# Altium PCB PCB_螺丝刀_TEST（测试用！！！）.pcbdoc
Units mm, origin at the board's own origin, x right, y up, seen from the top; angles counter-clockwise.
Board outline 48.26 x 97.66 mm, 2 copper layers (Top Layer, Bottom Layer); 30 components, 23 nets, 91 pads, 9 vias.
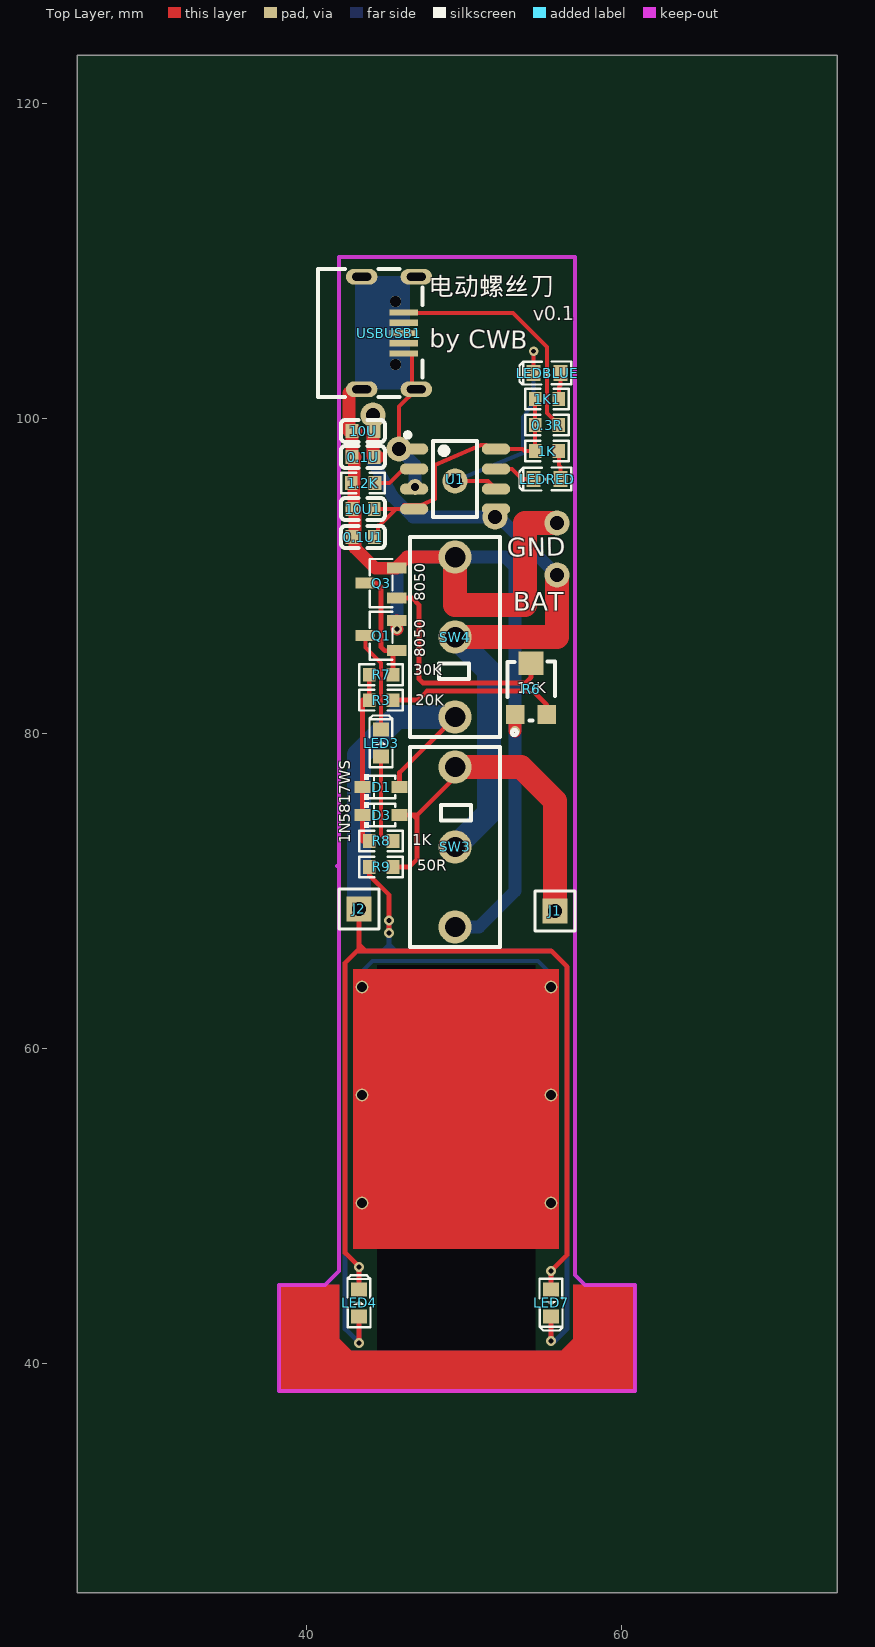
[diagram p0: Top Layer view]
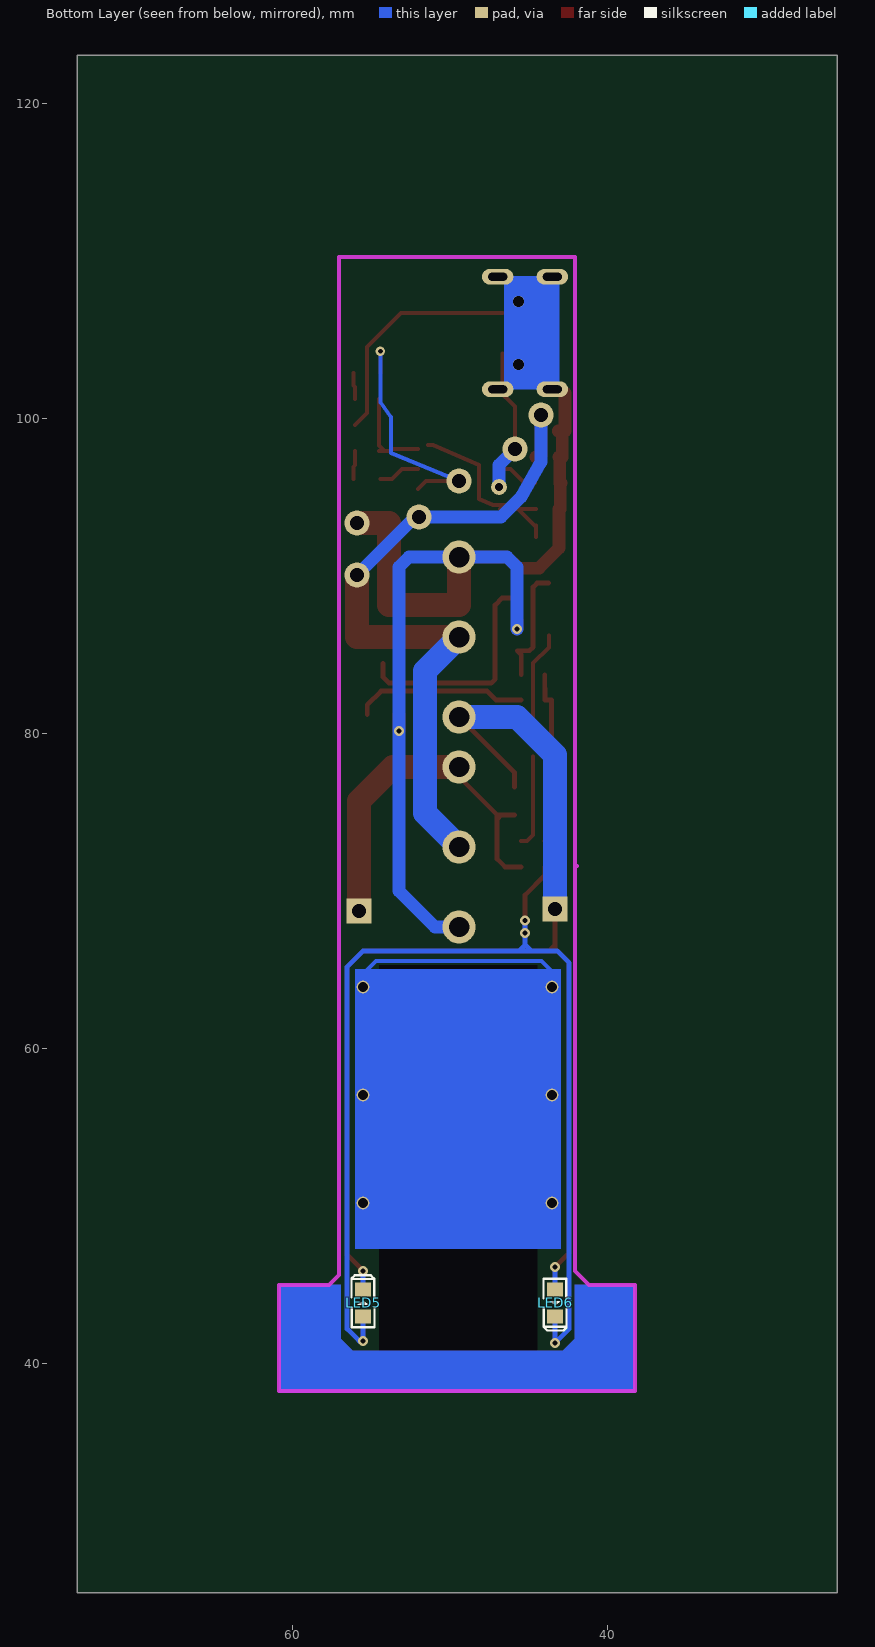
[diagram p1: Bottom Layer view, seen from below]

## Layer stack, top to bottom
Top Layer: signal copper (thickness not stored)
Dielectric: dielectric 0.32, FR-4, Dk 4.8
Bottom Layer: signal copper (thickness not stored)

## Board outline
73.66,25.4 25.4,25.4 25.4,123.063 73.66,123.063
cut-out: 54.483,40.259 54.483,65.259 44.45,65.259 44.45,40.259

## Components (designator, comment, footprint, x,y, rotation, side; value= is the part's Value field where it differs from the comment)
0.1U "10u" C0603 43.561,97.536 r0 top
0.1U1 "10u" C0603 43.561,92.456 r0 top
0.3R "0.3R" R0603 55.245,99.568 r180 top
1.2K "1.2k/1%" R0603 43.561,95.885 r0 top
1K "1k" R0603 55.245,97.917 r0 top
1K1 "1k" R0603 55.245,101.219 r0 top
10U "0.1u" C0603 43.561,99.187 r0 top
10U1 "0.1u" C0603 43.561,94.234 r0 top
D1 "1N5817WS" SOD-323_L1.8-W1.3-LS2.5-RD 44.704,76.581 r0 top
D3 "1N5817WS" SOD-323_L1.8-W1.3-LS2.5-RD 44.704,74.803 r0 top
J1 "电机+" HDR-M-2.54_1X1 55.753,68.707 r0 top
J2 "电机-" HDR-M-2.54_1X1 43.307,68.834 r0 top
LED3 "LED-0603_R" LED0603_RED#1 44.704,79.375 r90 top
LED4 "LED-0603_R" LED0603_RED#1 43.307,43.815 r90 top
LED5 "LED-0603_R" LED0603_RED#2 55.499,43.815 r270 bottom
LED6 "LED-0603_R" LED0603_RED#2 43.307,43.815 r90 bottom
LED7 "LED-0603_R" LED0603_RED#1 55.499,43.815 r270 top
LEDBLUE "LED-0603_G" LED0603_GREEN 55.245,102.87 r180 top
LEDRED "LED-0603_R" LED0603_RED#1 55.245,96.139 r180 top
Q1 "S8050_C2926165" SOT-23-3_L2.9-W1.3-P1.90-LS2.4-BR 44.704,86.191 r0 top
Q3 "S8050_C2926165" SOT-23-3_L2.9-W1.3-P1.90-LS2.4-BR 44.704,89.535 r0 top
R3 "20k" R0603 44.704,82.1 r180 top
R6 "10kΩ" RES-ADJ-SMD_3P-L3.0-W3.8-P1.75-BR 54.229,82.804 r270 top
R7 "30k" R0603 44.704,83.713 r180 top
R8 "1k" R0603 44.704,73.152 r180 top
R9 "50R" R0603 44.704,71.501 r180 top
SW3 "LF-108" SW-TH_DEALON_LF-108 49.403,72.771 r270 top
SW4 "LF-108" SW-TH_DEALON_LF-108 49.403,86.106 r90 top
U1 "TP4056_JX" SOP8_150MIL_JX 49.403,96.139 r270 top
USBUSB1 "micro 5PFour-legged board7.2There is a column card point0.4m" MICRO-USB-SMD_5P-P0.65-H-F-C40943 45.212,105.41 r270 top

## Footprints (in the part's own frame and the unit in brackets; to place one, negate y for a bottom-side part, rotate by r counter-clockwise, add the part's x,y. Pads: shape width x height; smd on the part's side, far side on the other; paste and mask are expansions set on the pad)
C0603 [mm]
  rect 0.8x0.9 smd: 1(-0.7,0) 2(0.7,0)
  silkscreen extent -1.41,-0.71 1.39,0.72
HDR-M-2.54_1X1 [mil]
  rect 62x62 hole 35: 1(0,0)
  silkscreen extent -50,-50 50,50
LED0603_GREEN [mm]
  rect 0.9x1 smd: 1(-0.85,0) 2(0.85,0)
  silkscreen extent -1.54,-0.73 1.75,0.73
LED0603_RED#1 [mm]
  rect 0.9x1 smd: 1(-0.85,0) 2(0.85,0)
  silkscreen extent -1.54,-0.73 1.75,0.73
LED0603_RED#2 [mm]
  rect 0.9x1 smd: 1(0.85,0) 2(-0.85,0)
  silkscreen extent -1.75,-0.73 1.54,0.73
MICRO-USB-SMD_5P-P0.65-H-F-C40943 [mm]
  oval 1x2 hole 0.5 slot 1.2 at 90 deg: 0(-3.575,-1.735) 0(-3.575,1.734) 0(3.575,-1.735) 0(3.575,1.734)
  rect 0.4x1.8 smd: 1(-1.301,0.934) 2(-0.65,0.934) 3(0,0.934) 4(0.65,0.934) 5(1.3,0.934)
  round 0.7 hole 0.7 unplated: ""(-2,0.414) ""(2,0.414)
  silkscreen extent -4.05,-4.51 4.05,2.14
R0603 [mm]
  rect 0.806x0.864 smd: 1(-0.753,0) 2(0.753,0)
  silkscreen extent -1.39,-0.66 1.39,0.66
RES-ADJ-SMD_3P-L3.0-W3.8-P1.75-BR [mm]
  rect 1.2x1.2 smd: 1(1.625,-1) 3(1.625,1)
  rect 1.5x1.6 smd: 2(-1.625,0)
  silkscreen extent -1.75,-1.51 2.92,1.51
SOD-323_L1.8-W1.3-LS2.5-RD [mm]
  rect 1x0.75 smd: 1(-1.173,0) 2(1.173,0)
  silkscreen extent -1.08,-0.8 0.9,0.8
SOP8_150MIL_JX [mm]
  oval 0.7x1.8 smd: 1(-1.905,-2.601) 2(-0.635,-2.601) 3(0.635,-2.601) 4(1.905,-2.601) 5(1.905,2.601) 6(0.635,2.601) 7(-0.635,2.601) 8(-1.905,2.601)
  silkscreen extent -2.95,-3.15 2.4,1.4
SOT-23-3_L2.9-W1.3-P1.90-LS2.4-BR [mm]
  rect 1.25x0.7 smd: 1(1,-0.95) 2(1,0.95) 3(-1,0)
  silkscreen extent -0.73,-1.53 0.73,1.53
SW-TH_DEALON_LF-108 [mm]
  round 2.1 hole 1.3: C(-5.08,0) NC(5.08,0) NO(0,0)
  silkscreen extent -6.35,-2.85 6.35,2.85

## Free pads (board coordinates)
  round 0.806 hole 0.61: 1(43.497,63.881) 1(55.499,63.881) 2(43.497,57.023) 2(55.499,57.023) 3(43.497,50.165) 3(55.499,50.165)
  round 1.6 hole 0.889: 6(55.88,90.043) 7(55.88,93.345) 8(49.403,96.012) 9(45.847,98.044) 10(51.943,93.726) 11(44.196,100.203)
  round 1 hole 0.5: 12(46.863,95.631)

## Via types
v1: diameter 0.62, hole 0.305, Top Layer to Bottom Layer, tented both sides, 8 vias
v2: diameter 0.61, hole 0.305, Top Layer to Bottom Layer, tented both sides, 1 vias

## Nets (pads, with @x,y where several pads share a name; then routed paths per layer and width w, separated by ;. In a path a pad name is that pad's centre, name@x,y a point inside that pad or via, vN(x,y) a via of type N, cw(c..) or ccw(c..) an arc to the next point about the centre after c; other vN are vias at no path point)
0: 
012: pad.1 pad.2 pad.3 | length 41.9
  Top Layer w0.254: pad.3@43.497,50.165 43.497,57.023 pad.1@43.497,63.881 ; pad.3@55.499,50.165 55.499,57.023 pad.1@55.499,63.881
  Bottom Layer w0.254: pad.1@43.497,63.881 43.497,64.868 44.169,65.54 54.67,65.54 55.499,64.711 pad.1@55.499,63.881
+5V: 0.3R.1 USBUSB1.1 | length 14.8
  Top Layer w0.254: USBUSB1.1@46.655,106.68 53.086,106.68 55.245,104.521 55.245,100.322 0.3R.1
BAT: 0.1U.2 10U.2 pad.6 pad.10 pad.11 SW3.NO SW4.NO U1.5 | length 46.5
  Top Layer w0.8: pad.11 44.196,97.601 0.1U.2 0.1U.2@44.515,97.536
  Top Layer w1.5: SW4.NO 55.88,86.106 pad.6
  Bottom Layer w0.8: pad.11 44.196,97.221 45.466,94.996 46.736,93.726 pad.10 52.197,93.726 pad.6
  Bottom Layer w1.5: SW3.NO 51.562,74.93 51.562,83.947 SW4.NO
BAT1: D1.1 D3.1 R3.2 R7.2 R8.2 | length 11.4
  Top Layer w0.3: D3.1 43.531,73.152 R8.2 ; D1.1 43.531,82.1 R3.2 ; D3.1 D1.1 ; R3.2 R7.2
GND: 0.1U1.1 0.1U.1 1.2K.1 10U1.1 10U.1 pad.7 pad.9 pad.12 Q1.2 Q3.2 R6.1 SW3.NC SW4.NC U1.1 U1.3 USBUSB1.0 USBUSB1.5 | length 81.6
  Top Layer w0.254: pad.9 45.847,100.735 USBUSB1.0@46.947,101.835 ; USBUSB1.5@46.655,104.11 46.655,101.836 USBUSB1.0@47.455,101.836
  Top Layer w0.8: USBUSB1.0@42.672,101.6 42.672,99.187 10U.1@43.114,99.187 ; 10U.1 0.1U.1 ; 1.2K.1@42.926,95.885 42.979,95.832 10U1.1@42.979,94.234 ; 1.2K.1@43,95.885 43,97.397 0.1U.1 ; 10U1.1@43.053,94.234 43.053,92.456 43.053,91.759 44.327,90.485 Q3.2@45.642,90.485 ; 0.1U.1@43.053,97.536 0.1U.1 ; Q1.2 45.704,86.63 v1(45.72,86.614) ; Q3.2 45.704,90.535 46.355,91.186 SW4.NC ; pad.9 U1.1@45.974,98.044 ; v1(53.213,80.137) 53.213,81.163 R6.1
  Top Layer w1.5: SW4.NC 49.403,88.138 53.848,88.138 53.848,93.345 pad.7
  Bottom Layer w0.8: v1(45.72,86.614) 45.72,90.551 46.355,91.186 SW4.NC 52.578,91.186 53.213,90.551 v1(53.213,80.137) 53.213,69.977 50.927,67.691 SW3.NC ; pad.9 46.863,97.028 pad.12
J1_1: D3.2 J1.1 R9.1 SW3.C | length 25.2
  Top Layer w0.3: R9.1 46.482,71.501 46.99,72.009 46.99,74.529 ; SW3.C 49.403,77.216 46.99,74.803 ; 46.99,74.529 46.99,74.803 ; 46.99,74.529 46.716,74.803 D3.2 46.99,74.803
  Top Layer w1.5: SW3.C 53.594,77.851 55.753,75.692 J1.1
J2_1: D1.2 J2.1 LED4.2 LED5.2 LED6.1 LED7.1 SW4.C | length 88.3
  Top Layer w0.3: 43.165,66.152 43.998,66.167 ; J2.1@43.18,68.707 J2.1 ; LED4.2 v1(43.307,46.101) 42.418,46.99 42.418,65.405 43.307,66.294 J2.1 ; D1.2 45.876,77.499 SW4.C ; LED7.1 v1(55.499,45.847) 56.515,46.863 56.515,65.151 55.499,66.167 43.688,66.167 43.307,66.548 J2.1
  Bottom Layer w0.3: LED6.1 v1(43.307,46.101) ; LED5.2 v1(55.499,45.847)
  Bottom Layer w1.5: J2.1 43.307,78.613 45.72,81.026 SW4.C
LED3_1: LED3.1 R8.1 | length 5.9
  Top Layer w0.254: LED3.1 44.704,73.533 45.085,73.152 R8.1
LED3_2: LED3.2 Q1.3 | length 6.4
  Top Layer w0.254: Q1.3 43.704,85.455 44.704,84.455 LED3.2
LED4_1: LED4.1 LED5.1 LED6.2 LED7.2 R9.2 | length 77.5
  Top Layer w0.3: v1(43.307,41.275) LED4.1 ; R9.2 43.95,70.985 45.212,69.723 v1(45.212,68.105) ; v1(45.212,67.31) v1(45.212,68.105) ; v1@45.212,68.055 v1(45.212,68.105) ; v1(55.499,41.402) LED7.2
  Bottom Layer w0.3: LED6.2 v1(43.307,41.275) 42.418,42.164 42.418,65.405 43.18,66.167 44.831,66.167 45.212,66.548 ; 44.839,66.167 45.593,66.167 ; v1(45.212,68.105) 45.212,66.548 ; LED5.1 v1(55.499,41.402) 55.753,41.402 56.515,42.164 56.515,65.151 55.499,66.167 45.593,66.167 ; 45.212,66.548 45.593,66.167
R2_2: 1K1.2 LEDBLUE.1 | length 1.7
  Top Layer w0.254: 1K1.2 55.998,101.994 56.095,102.091 LEDBLUE.1
R3_1: R3.1 R6.3 | length 11
  Top Layer w0.3: R3.1 47.048,82.1 47.625,82.677 54.356,82.677 55.23,81.803 R6.3
R5_2: 1K.2 LEDRED.1 | length 1.8
  Top Layer w0.254: 1K.2 55.998,97.015 56.095,96.918 LEDRED.1
R6_2: Q3.1 R6.2 | length 14.5
  Top Layer w0.3: Q3.1 46.67,88.585 47.117,88.138 47.117,83.439 47.371,83.185 53.848,83.185 54.229,83.566 R6.2
R7_1: Q1.1 Q3.3 R7.1 | length 7.6
  Top Layer w0.3: Q3.3 44.45,89.535 44.704,89.281 44.704,86.191 ; 44.704,86.192 44.704,85.471 44.933,85.242 Q1.1@45.705,85.242 ; R7.1 45.457,84.995 Q1.1@45.704,85.241
S$73001: 
S$87386: 
S$87390: 
U1_2: 1.2K.2 U1.2 | length 2.6
  Top Layer w0.254: 1.2K.2@44.568,95.885 45.251,95.885 46.14,96.774 U1.2
U1_4: 0.1U1.2 0.3R.2 1K1.1 1K.1 10U1.2 U1.4 U1.8 | length 18.3
  Top Layer w0.254: 0.1U1.2@44.515,92.456 44.515,93.185 44.61,93.185 45.659,94.234 ; 10U1.2@44.515,94.234 45.659,94.234 ; U1.4@46.167,94.488 47.254,94.488 48.133,94.869 48.133,97.028 51.064,98.298 U1.8@51.369,98.298 ; U1.4 45.659,94.234 ; U1.8 53.682,98.044 53.809,97.917 1K.1@54.151,97.917 ; 1K.1 1K.1@54.151,97.917 ; 1K1.1 0.3R.2 54.492,98.258 1K.1@54.151,97.917
U1_6: LEDBLUE.2 pad.8 U1.6 | length 15.6
  Top Layer w0.254: pad.8 51.496,96.012 U1.6 ; LEDBLUE.2 v2(54.395,104.26)
  Bottom Layer w0.254: pad.8 53.721,97.79 53.721,100.076 54.394,101.003 v2(54.395,104.26)
U1_7: LEDRED.2 U1.7 | length 2.7
  Top Layer w0.254: U1.7 53.031,96.774 53.666,96.139 LEDRED.2
pads on no net: USBUSB1. USBUSB1.2 USBUSB1.3 USBUSB1.4

## Other copper
Top Layer:
  region net 0: 38.252,44.958 41.935,44.958 42.062,44.958 42.062,41.529 42.824,40.767 44.348,40.767 44.475,40.767 56.159,40.767 56.921,41.529 56.921,41.91 56.921,44.958 60.833,44.958 60.833,38.1 39.014,38.1 38.252,38.1
  rectangle net 012: 42.926,47.244 56.007,65.024
Bottom Layer:
  region net 0: 38.252,44.958 41.935,44.958 42.062,44.958 42.062,41.529 42.824,40.767 44.348,40.767 44.475,40.767 56.159,40.767 56.921,41.529 56.921,41.91 56.921,44.958 60.833,44.958 60.833,38.1 60.223,38.1 39.014,38.1 38.252,38.1
  region net GND: 43.053,101.854 43.053,109.004 46.523,109.004 46.523,101.854
  rectangle net 012: 42.926,47.244 56.007,65.024

## Silkscreen, mask and mechanical layers (free items; w line width, h text height)
Top Overlay:
  text "电动螺丝刀" at 47.752,107.442 h2
  text "v0.1" at 54.356,105.918 h1.5 r1
  text "by CWB" at 47.752,104.14 h2 r359
  text "GND" at 52.705,90.805 h2.03 r1
  text "8050" at 47.752,88.392 h1.2 r90
  text "BAT" at 53.086,87.376 h2.03
  text "8050" at 47.752,84.836 h1.2 r90
  text "30K" at 46.736,83.439 h1.2
  text "10K" at 53.34,82.296 h1.2
  text "20K" at 46.863,81.534 h1.2 r359
  text "1N5817WS" at 42.988,73.019 h1.2 r90
  text "1K" at 46.671,72.638 h1.2
  text "50R" at 46.99,70.993 h1.2
Top Solder:
  rectangle: 42.926,47.244 56.007,64.389
  region net J2_1: 38.252,44.958 41.935,44.958 42.062,44.958 42.062,41.529 42.824,40.767 44.348,40.767 44.475,40.767 56.159,40.767 56.921,41.529 56.921,41.91 56.921,44.958 60.833,44.958 60.833,38.1 39.014,38.1 38.252,38.1
  region net 0: 38.252,44.958 41.935,44.958 42.062,44.958 42.062,41.529 42.824,40.767 44.348,40.767 44.475,40.767 56.159,40.767 56.921,41.529 56.921,41.91 56.921,44.958 60.833,44.958 60.833,38.1 60.223,38.1 39.014,38.1 38.252,38.1
Bottom Solder:
  rectangle: 42.926,47.244 56.007,64.516
  region net J2_1: 38.252,44.958 41.935,44.958 42.062,44.958 42.062,41.529 42.824,40.767 44.348,40.767 44.475,40.767 56.159,40.767 56.921,41.529 56.921,41.91 56.921,44.958 60.35,44.958 60.35,38.227 60.223,38.1 39.014,38.1 38.252,38.1
  region net 0: 38.252,44.958 41.935,44.958 42.062,44.958 42.062,41.529 42.824,40.767 44.348,40.767 44.475,40.767 56.159,40.767 56.921,41.529 56.921,41.91 56.921,44.958 60.833,44.958 60.833,38.1 60.223,38.1 39.014,38.1 38.252,38.1